# Altium PCB Rainbow F103C_Pcb.PcbDoc
Units mil, origin at the board's own origin, x right, y up, seen from the top; angles counter-clockwise.
Board outline 1950 x 850 mil, 2 copper layers (Top Layer, Bottom Layer); 62 components, 47 nets, 142 pads, 26 vias.
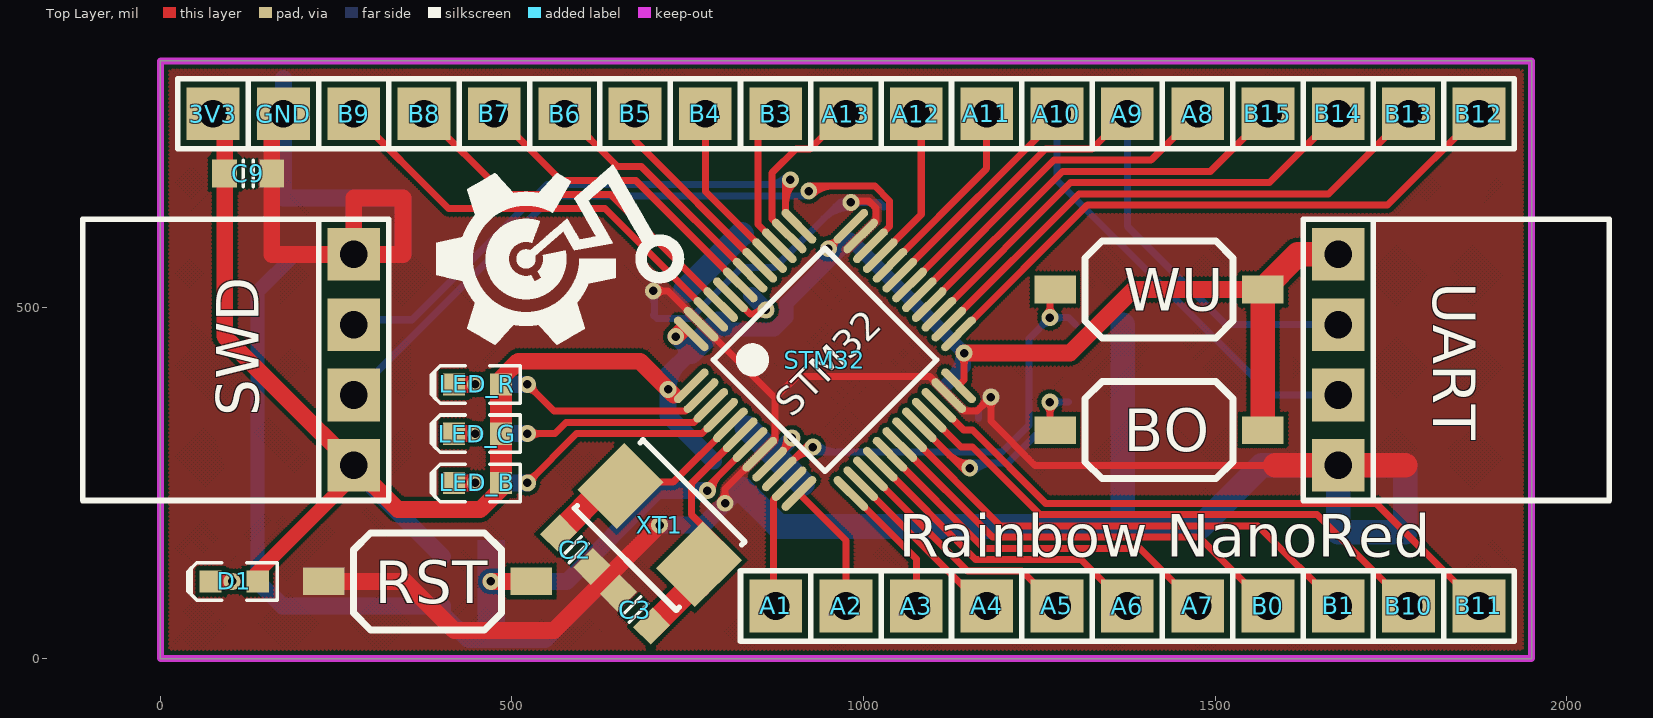
[diagram p0: Top Layer view]
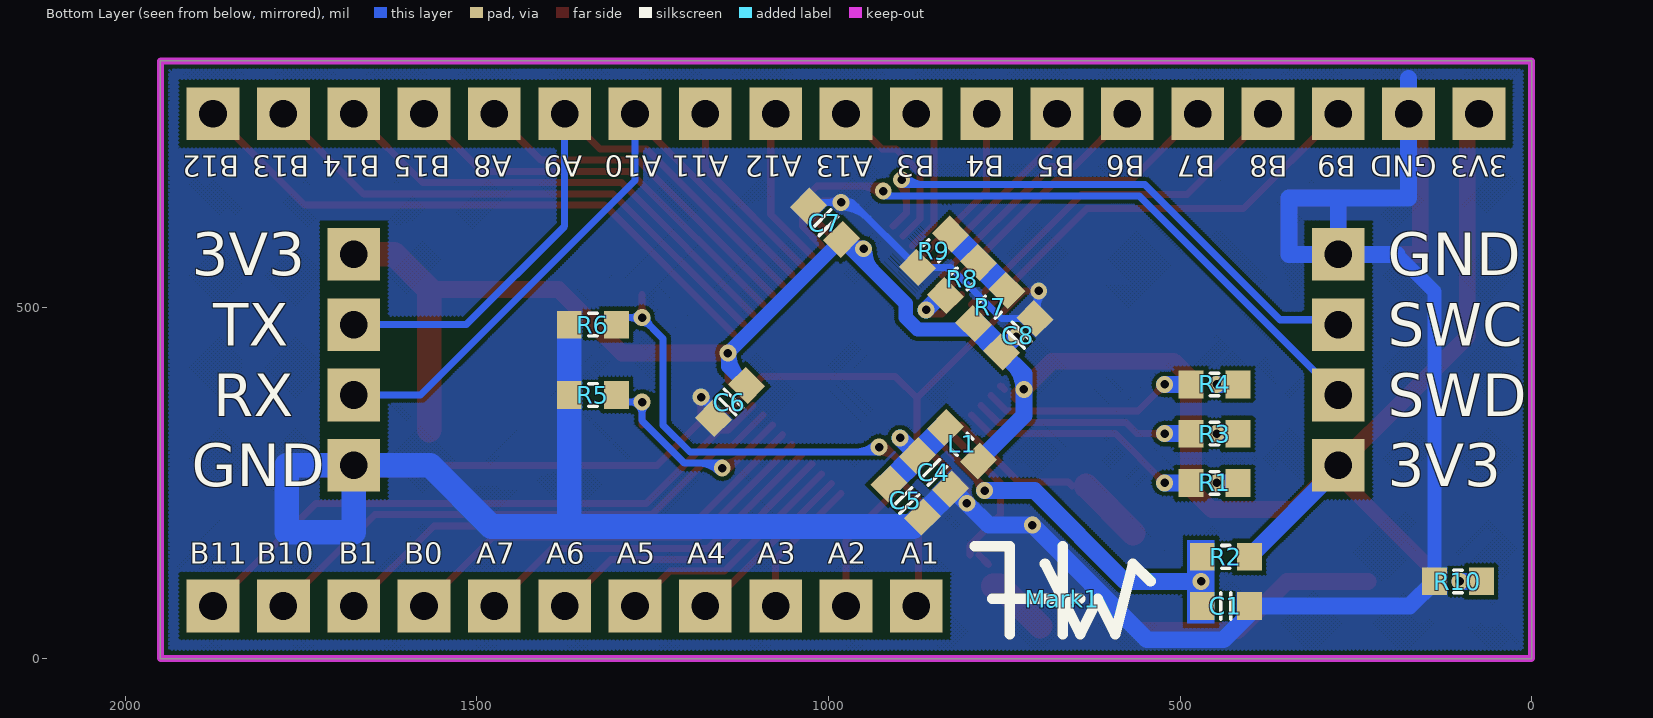
[diagram p1: Bottom Layer view, seen from below]

## Layer stack, top to bottom
Top Layer: signal copper 1.4
Dielectric: dielectric 12.6, FR-4, Dk 4.8
Bottom Layer: signal copper 1.4

## Board outline
0,850 1950,850 1950,0 0,0

## Design rules (kind name [scope] priority, off if disabled: settings)
Clearance [All] p1: gap=6
ComponentClearance [All] p1: gap=0 collisioncheckmode=3 verticalgap=0 showdistances=FALSE
MinimumSolderMaskSliver [All] p1: minsoldermaskwidth=5
PlaneConnect [All] p1: planeconnectstyle=Direct reliefexpansion=20 reliefentries=4 reliefconductorwidth=10 reliefairgap=10
PolygonConnect [All] p1: connectstyle=Direct reliefconductorwidth=10 reliefentries=4 polygonreliefangle="90 Angle" airgapwidth=10
RoutingVias [All] p1: holewidth=12 width=24 viastyle="Through Hole" minholewidth=12 minwidth=24 maxholewidth=50 maxwidth=100
SilkToSilkClearance [All] p1: silktosilkclearance=1
SilkToSolderMaskClearance [IsPad] p1: minsilkscreentomaskgap=1 clearancetoexposedcopper=TRUE
SolderMaskExpansion [All] p1: expansion=0
Width [All] p1: maxlimit=50 minlimit=6 preferedwidth=10
23 further rules are at their usual default settings.

## Components (designator, comment, footprint, x,y, rotation, side; value= is the part's Value field where it differs from the comment)
3V3 "HDR1X1_180_2.54" HDR1X1_180_2.54 75,775 r90 top (schematic designator VCC)
A1 "HDR1X1_180_2.54" HDR1X1_180_2.54 875,75 r0 top (schematic designator PA1)
A2 "HDR1X1_180_2.54" HDR1X1_180_2.54 975,75 r0 top (schematic designator PA2)
A3 "HDR1X1_180_2.54" HDR1X1_180_2.54 1075,75 r0 top (schematic designator PA3)
A4 "HDR1X1_180_2.54" HDR1X1_180_2.54 1175,75 r0 top (schematic designator PA4)
A5 "HDR1X1_180_2.54" HDR1X1_180_2.54 1275,75 r0 top (schematic designator PA5)
A6 "HDR1X1_180_2.54" HDR1X1_180_2.54 1375,75 r0 top (schematic designator PA6)
A7 "HDR1X1_180_2.54" HDR1X1_180_2.54 1475,75 r0 top (schematic designator PA7)
A8 "HDR1X1_180_2.54" HDR1X1_180_2.54 1475,775 r0 top (schematic designator PA8)
A9 "HDR1X1_180_2.54" HDR1X1_180_2.54 1375,775 r0 top (schematic designator PA9)
A10 "HDR1X1_180_2.54" HDR1X1_180_2.54 1275,775 r90 top (schematic designator PA10)
A11 "HDR1X1_180_2.54" HDR1X1_180_2.54 1175,775 r90 top (schematic designator PA11)
A12 "HDR1X1_180_2.54" HDR1X1_180_2.54 1075,775 r90 top (schematic designator PA12)
A13 "HDR1X1_180_2.54" HDR1X1_180_2.54 975,775 r90 top (schematic designator PA13)
B0 "HDR1X1_180_2.54" HDR1X1_180_2.54 1575,75 r0 top (schematic designator PB1)
B1 "HDR1X1_180_2.54" HDR1X1_180_2.54 1675,75 r0 top (schematic designator PB2)
B3 "HDR1X1_180_2.54" HDR1X1_180_2.54 875,775 r0 top (schematic designator PB3)
B4 "HDR1X1_180_2.54" HDR1X1_180_2.54 775,775 r0 top (schematic designator PB4)
B5 "HDR1X1_180_2.54" HDR1X1_180_2.54 675,775 r0 top (schematic designator PB5)
B6 "HDR1X1_180_2.54" HDR1X1_180_2.54 575,775 r0 top (schematic designator PB6)
B7 "HDR1X1_180_2.54" HDR1X1_180_2.54 475,775 r0 top (schematic designator PB7)
B8 "HDR1X1_180_2.54" HDR1X1_180_2.54 375,775 r0 top (schematic designator PB8)
B9 "HDR1X1_180_2.54" HDR1X1_180_2.54 275,775 r0 top (schematic designator PB9)
B10 "HDR1X1_180_2.54" HDR1X1_180_2.54 1775,75 r90 top (schematic designator PB10)
B11 "HDR1X1_180_2.54" HDR1X1_180_2.54 1875,75 r90 top (schematic designator PB11)
B12 "HDR1X1_180_2.54" HDR1X1_180_2.54 1875,775 r90 top (schematic designator PB12)
B13 "HDR1X1_180_2.54" HDR1X1_180_2.54 1775,775 r90 top (schematic designator PB13)
B14 "HDR1X1_180_2.54" HDR1X1_180_2.54 1675,775 r90 top (schematic designator PB14)
B15 "HDR1X1_180_2.54" HDR1X1_180_2.54 1575,775 r90 top (schematic designator PB15)
BO "BOOT" BT_TACT 1420,325 r270 top (schematic designator S3)
C1 "Cap_0603" CAP_0603 435,75 r180 bottom
C2 "Cap_0603" CAP_0603 590,155 r135 top
C3 "Cap_0603" CAP_0603 675,70 r315 top
C4 "Cap_0603" CAP_0603 850,265 r225 bottom
C5 "Cap_0603" CAP_0603 890,225 r225 bottom
C6 "Cap_0603" CAP_0603 1140,365 r135 bottom
C7 "Cap_0603" CAP_0603 1005,620 r225 bottom
C8 "Cap_0603" CAP_0603 730,460 r315 bottom
C9 "Cap_0603" CAP_0603 125,690 r180 top
D1 "LED_0603_BLUE" LED_0603_BLUE 105,110 r180 top
GND "HDR1X1_180_2.54" HDR1X1_180_2.54 175,775 r0 top
L1 "Ind_0603" IND_0603 810,305 r45 bottom
LED_B "LED_0603_BLUE" LED_0603_BLUE 451,250 r180 top
LED_G "LED_0603_GREEN" LED_0603_GREEN 451,320 r180 top
LED_R "LED_0603_RED" LED_0603_RED 451,390 r180 top
Mark1 "Mark" HW_Mark 667,85 r180 bottom
R1 "Res_0603" RES_0603 451,250 r180 bottom
R2 "Res_0603" RES_0603 435,145 r0 bottom
R3 "Res_0603" RES_0603 451,320 r180 bottom
R4 "Res_0603" RES_0603 451,390 r180 bottom
R5 "Res_0603" RES_0603 1335,375 r0 bottom
R6 "Res_0603" RES_0603 1335,475 r0 bottom
R7 "Res_0603" RES_0603 770,500 r315 bottom
R8 "Res_0603" RES_0603 810,540 r135 bottom
R9 "Res_0603" RES_0603 850,580 r315 bottom
R10 "Res_0603" RES_0603 105,110 r180 bottom
RST "RST" BT_TACT 380,110 r270 top locked (schematic designator S1)
STM32 "STM32F103C" STM32F_48 945,425 r45 top
SWD "HDR1X4_90F_2.54" HDR1X4_90F_2.54 275,275 r90 top
UART "HDR1X4_90F_2.54" HDR1X4_90F_2.54 1675,575 r270 top
WU "WU" BT_TACT 1420,525 r270 top (schematic designator S2)
XT1 "XTAL_5032" XTAL_5032 710,190 r135 top

## Footprints (in the part's own frame and the unit in brackets; to place one, negate y for a bottom-side part, rotate by r counter-clockwise, add the part's x,y. Pads: shape width x height; smd on the part's side, far side on the other; paste and mask are expansions set on the pad)
BT_TACT [mm]
  rect 1x1.5 smd: 1(0,-3.75) 2(0,3.75)
  silkscreen extent -1.75,-2.67 1.75,2.67, body extent -1.75,-3.59 1.75,3.61, height 5
CAP_0603 [mm] "Chip Capacitor, Body 1.6x0.8mm, 0603, IPC Medium Density"
  rect 0.9x1 smd: 1(-0.85,0) 2(0.85,0)
  Top Layer pour cut-out: -0.4,0.6 0.4,0.6 0.4,-0.6 -0.4,-0.6
  silkscreen extent -0.18,-0.48 0.18,0.48, body extent -0.85,-0.45 0.85,0.45, height 0.89
HDR1X1_180_2.54 [mm] "Connector; Header; 2 Position"
  rect 1.905x1.905 hole 1: 1(0,0)
  silkscreen extent -1.27,-1.27 1.27,1.27, body extent -1.27,-1.27 1.27,1.27, height 7.58
HDR1X4_90F_2.54 [mm] "Connector; Header; 2 Position"
  rect 1.905x1.905 hole 1: 1(0,0) 2(2.54,0) 3(5.08,0) 4(7.62,0)
  silkscreen extent -1.27,-1.27 8.89,9.78, body extent -1.39,-0.16 9.02,9.9, height 2.52
HW_Mark [mil]
  silkscreen extent -125,-50 125,75
IND_0603 [mm] "Chip bead, Body 1.6x0.8mm, 0603, IPC Medium Density"
  rect 0.9x1 smd: 1(-0.85,0) 2(0.85,0)
  Top Layer pour cut-out: -0.4,0.6 0.4,0.6 0.4,-0.6 -0.4,-0.6
  silkscreen extent -0.15,-0.41 0.15,0.41, body extent -0.8,-0.4 0.8,0.4, height 0.79
LED_0603_BLUE [mm] "Chip Capacitor, 2-Leads, Body 1.6x0.8mm, IPC Medium Density"
  rect 0.8x0.8 smd: 1(-0.85,0) 2(0.85,0)
  Top Layer pour cut-out: -0.5,0.5 0.5,0.5 0.5,-0.5 -0.5,-0.5
  silkscreen extent -1.55,-0.67 1.68,0.67, body extent -0.8,-0.4 0.8,0.4, height 0.75
LED_0603_GREEN [mm] "Chip Capacitor, 2-Leads, Body 1.6x0.8mm, IPC Medium Density"
  rect 0.8x0.8 smd: 1(-0.85,0) 2(0.85,0)
  Top Layer pour cut-out: -0.5,0.5 0.5,0.5 0.5,-0.5 -0.5,-0.5
  silkscreen extent -1.55,-0.67 1.68,0.67, body extent -0.8,-0.4 0.8,0.4, height 0.75
LED_0603_RED [mm] "Chip Capacitor, 2-Leads, Body 1.6x0.8mm, IPC Medium Density"
  rect 0.8x0.8 smd: 1(-0.85,0) 2(0.85,0)
  Top Layer pour cut-out: -0.5,0.5 0.5,0.5 0.5,-0.5 -0.5,-0.5
  silkscreen extent -1.55,-0.67 1.68,0.67, body extent -0.8,-0.4 0.8,0.4, height 0.75
RES_0603 [mm]
  rect 0.9x1 smd: 1(-0.85,0) 2(0.85,0)
  Top Layer pour cut-out: -0.4,0.6 0.4,0.6 0.4,-0.6 -0.4,-0.6
  silkscreen extent -0.15,-0.41 0.15,0.41, body extent -0.87,-0.47 0.88,0.48, height 0.54
STM32F_48 [mm] "TSQFP, 48-Leads, Body 9.0x9.0mm (max), Pitch 0.50mm, IPC Medium Density"
  oval 1.65x0.3 smd: 1(-4.075,2.75) 2(-4.075,2.25) 3(-4.075,1.75) 4(-4.075,1.25) 5(-4.075,0.75) 6(-4.075,0.25) 7(-4.075,-0.25) 8(-4.075,-0.75) 9(-4.075,-1.25) 10(-4.075,-1.75) 11(-4.075,-2.25) 12(-4.075,-2.75) 25(4.075,-2.75) 26(4.075,-2.25) 27(4.075,-1.75) 28(4.075,-1.25) 29(4.075,-0.75) 30(4.075,-0.25) 31(4.075,0.25) 32(4.075,0.75) 33(4.075,1.25) 34(4.075,1.75) 35(4.075,2.25) 36(4.075,2.75)
  oval 0.3x1.65 smd: 13(-2.75,-4.075) 14(-2.25,-4.075) 15(-1.75,-4.075) 16(-1.25,-4.075) 17(-0.75,-4.075) 18(-0.25,-4.075) 19(0.25,-4.075) 20(0.75,-4.075) 21(1.25,-4.075) 22(1.75,-4.075) 23(2.25,-4.075) 24(2.75,-4.075) 37(2.75,4.075) 38(2.25,4.075) 39(1.75,4.075) 40(1.25,4.075) 41(0.75,4.075) 42(0.25,4.075) 43(-0.25,4.075) 44(-0.75,4.075) 45(-1.25,4.075) 46(-1.75,4.075) 47(-2.25,4.075) 48(-2.75,4.075)
  silkscreen extent -2.85,-2.85 2.85,2.85, body extent -4.5,-4.5 4.5,4.5, height 1.59
XTAL_5032 [mm] "Molded Capacitor, 2-Leads, Body 5.0x3.2mm, IPC Medium Density"
  rect 2x2.4 smd: 1(-2,0) 2(2,0)
  silkscreen extent -2.6,-1.75 2.6,1.75, body extent -2.5,-1.6 2.5,1.6, height 1

## Part data
3V3 A1 A2 A3 A4 A5 A6 A7 A8 A9 A10 A11 A12 A13 B0 B1 B3 B4 B5 B6 B7 B8 B9 B10 B11 B12 B13 B14 B15 GND SWD UART: "Header"
BO RST WU: library part BT_TACT, "Switch"
C1 C2 C3 C4 C5 C6 C7 C8 C9: "Capacitor"
D1 LED_B LED_G LED_R: "LED"
L1: "Inductor"
Mark1: library part HW
R1 R2 R3 R4 R5 R6 R7 R8 R9 R10: "Resistor"
STM32: "MCU"
XT1: "Crystal Oscillator"

## Via types
v1: diameter 24, hole 12, Top Layer to Bottom Layer, 26 vias

## Nets (pads, with @x,y where several pads share a name; then routed paths per layer and width w, separated by ;. In a path a pad name is that pad's centre, name@x,y a point inside that pad or via, vN(x,y) a via of type N, cw(c..) or ccw(c..) an arc to the next point about the centre after c; other vN are vias at no path point)
3V3: 3V3.1 BO.2 C6.2 C7.2 C8.2 C9.2 D1.1 L1.1 LED_B.1 LED_G.1 LED_R.1 R2.1 R7.2 STM32.1 STM32.24 STM32.36 STM32.48 SWD.1 UART.1 WU.2 | length 3594.4
  Top Layer w10: SWD.1@275,260 SWD.1 ; STM32.1@749.89,383 STM32.1 ; v1@950,583.11 STM32.36 ; v1@950,590 ccw(c950,606.62) STM32.36@961.76,594.87 ; v1@957,583 cw(c974.17,583) STM32.36@962.03,595.14 ; STM32.24 1143,396.11 v1(1143,434.67) ; v1@1138.05,429.72 cw(c1126.1,417.77) 1143,417.77 cw(c1159.9,417.77) v1@1147.95,429.72
  Top Layer w20: D1.1@133,118 SWD.1@275,260
  Top Layer w24: 3V3.1 91.54,758.46 C9.2 91.54,458.46 219.5,330.5 219.5,330.04 230.04,319.5 230.5,319.5 SWD.1 338,212 455,212 484.46,241.46 LED_B.1 ; LED_R.1 484.46,398.46 509,423 682,423 v1@730,375 ; v1(733,458) v1@740.5,465.5 ; v1(1143,434.67) 1293.67,434.67 1384,525 WU.2
  Top Layer w31: LED_B.1 LED_G.1 LED_R.1
  Top Layer w35: BO.2 WU.2 1617.64,575 UART.1
  Bottom Layer w20: R7.2 802,468 873,468 890,485 890,505 C7.2 ; 933.86,548.86 ccw(c899.72,583) v1@948,583 ; v1@950.17,584.99 ccw(c953.59,624.08) C7.2 ; C6.2 1143,415.33 v1(1143,434.67) C7.2 ; C6.2@1125.9,398.23 ccw(c1089.46,434.67) v1@1141,434.67
  Bottom Layer w24: SWD.1 275,271.54 R2.1 ; v1(733,458) C8.2@754.16,436.84 ; 737.33,420 ccw(c774.33,383) v1(722,383) ; C8.2 722,404.67 v1(722,383) ; L1.1 722,345.67 v1(722,383)
  Bottom Layer w35: C8.2 754.16,436.84 R7.2
  other v1: 950,583
BOOT: BO.1 R5.1 STM32.20 | length 476.3
  Top Layer w10: STM32.20 v1@1145.38,266.38 ; 1121.57,290.19 ccw(c1151,319.63) v1@1151,278 ; 1138.64,273.12 ccw(c1151,285.48) v1@1151,268 ; v1@1260.05,360.05 cw(c1248.1,348.1) 1265,348.1 cw(c1281.9,348.1) v1@1269.95,360.05 ; BO.1@1265,332.36 v1(1265,365)
  Bottom Layer w10: v1@1151,278 1204.54,278 1265,338.46 v1(1265,365) R5.1@1291.54,365 ; v1@1155.95,266.05 cw(c1184.8,237.2) 1184.8,278 ; v1@1260.05,360.05 cw(c1248.1,348.1) 1265,348.1 cw(c1281.9,348.1) 1269.95,360.05 cw(c1281.9,348.1) 1281.9,365 cw(c1281.9,381.9) v1@1269.95,369.95
  other v1: 1151,271
BOOT0: R8.1 STM32.44 | length 120.1
  Top Layer w10: STM32.44 838.24,490 ; v1@854.97,499.56 cw(c838.24,509.42) 838.24,490 ; v1(861,496) 855,490 838.24,490
  Bottom Layer w10: R8.1 R8.1@840.66,516.34
  Bottom Layer w24: R8.1@840.66,516.34 v1(861,496)
GND: C1.2 C2.1 C3.1 C4.2 C5.2 C6.1 C7.1 C8.1 C9.1 GND.1 R5.2 R6.2 R9.2 R10.1 RST.1 STM32.8 STM32.23 STM32.35 STM32.47 SWD.4 UART.4 | length 6983.2
  Top Layer w10: v1(701,523) 721.73,523 STM32.47 874.21,370.51 ; v1@705.95,518.05 cw(c717.9,506.1) 717.9,523 cw(c717.9,539.9) v1@705.95,527.95 ; v1@798.05,225.95 ccw(c786.1,237.9) 803,237.9 ccw(c819.9,237.9) v1@807.95,225.95 ; v1(803,221) 803,241.24 STM32.8 874.21,312.45 874.21,370.51 ; v1@987,651 1007.38,651 1017.58,640.79 1017.58,622.86 STM32.35 ; v1@1174,372 cw(c1157.1,372) 1169.05,360.05 cw(c1181,348.1) v1@1181,365 ; v1@1176.05,367.05 cw(c1164.1,355.1) 1181,355.1 cw(c1197.9,355.1) v1@1185.95,367.05 ; 1585.76,275 1244,275 1181,338 v1(1181,372) 1161.42,352.42 1142.86,352.42 STM32.23 1094.27,401 904.7,401 874.21,370.51 ; UART.4@1669,269 UART.4@1675,263
  Top Layer w24: GND.1 165.46,775 158.46,768 C9.1 158.46,575 SWD.4 ; RST.1 348,110 418,40 560,40 v1(710,190) ; SWD.4 275,655 345,655 345,575 SWD.4
  Top Layer w35: 1585.76,275 UART.4 1770,275
  Bottom Layer w10: v1@696.05,518.05 cw(c679.27,501.27) C8.1@703,501.27 ; C8.1@701,489 C8.1 753.66,483.66 826.34,556.34 R9.2 966.33,649 ; C8.1@703,489 v1@703,523 ; 703,510.93 cw(c713.07,510.93) v1@705.95,518.05 ; 943.29,625.97 cw(c982,587.26) v1@982,642 ; 960.36,643.04 cw(c982,621.4) v1@982,652 ; v1@976.79,644.33 ccw(c966.33,634.95) 966.33,649 ; v1@976.79,653.67 cw(c966.33,663.05) 966.33,649 ; v1@986.95,644.05 cw(c998.9,632.1) 998.9,649 cw(c998.9,665.9) v1@986.95,653.95 ; C7.1@1028.66,642.66 1022.33,649 966.33,649 ; C6.1 1163.66,354.66 v1(1181,372) ; v1@1174,372 cw(c1157.1,372) 1169.05,360.05 cw(c1181,348.1) v1@1181,365
  Bottom Layer w20: R10.1 138.46,521.86 191.61,575
  Bottom Layer w24: R10.1 173.46,75 C1.2 401.54,63.46 438,27 547,27 v1(710,190) 772,190 v1(803,221) 823.34,241.34 C4.2 ; 175,825 GND.1 175,655 275,655 ; 191.61,575 SWD.4 ; SWD.4 345,575 345,655 275,655 ; SWD.4 275,655
  Bottom Layer w35: C4.2 C5.2 879.67,188 1479.21,188 1566.21,275 UART.4 ; 1368.46,188 R6.2 ; UART.4 1770,275 1770,180 1675,180 UART.4
  other v1: 982,649
LED_B: R1.1 STM32.4 | length 378.8
  Top Layer w10: v1(522,250) 592,320 770.4,320 STM32.4 ; v1@522,257 ccw(c522,273.9) 533.95,261.95 ccw(c545.9,250) v1@529,250
  Bottom Layer w24: R1.1 v1(522,250)
LED_G: R3.1 STM32.3 | length 341.6
  Top Layer w10: v1(522,320) 561,320 577,336 758.56,336 STM32.3 ; v1@526.95,315.05 cw(c538.9,303.1) 538.9,320 cw(c538.9,336.9) v1@526.95,324.95
  Bottom Layer w24: R3.1 v1(522,320)
LED_R: R4.1 STM32.2 | length 335.9
  Top Layer w10: v1@522,383 cw(c522,366.1) 533.95,378.05 cw(c545.9,390) v1@529,390 ; v1(522,390) 560,352 746.73,352 STM32.2
  Bottom Layer w24: R4.1 v1(522,390)
NetD1_2: D1.2 R10.2 | length 60.9
  Top Layer w24: D1.2 v1(102,110)
  Bottom Layer w24: R10.2 v1(102,110)
NetLED_B_2: LED_B.2 R1.2 | length 60.9
  Top Layer w24: LED_B.2 v1(448,250)
  Bottom Layer w24: R1.2 v1(448,250)
NetLED_G_2: LED_G.2 R3.2 | length 60.9
  Top Layer w24: LED_G.2 v1(448,320)
  Bottom Layer w24: R3.2 v1(448,320)
NetLED_R_2: LED_R.2 R4.2 | length 60.9
  Top Layer w24: LED_R.2 v1(448,390)
  Bottom Layer w24: R4.2 v1(448,390)
NetR7_1: R7.1 R8.2 R9.1 | length 113.1
  Bottom Layer w35: R7.1 R8.2 R9.1
PA1: A1.1 STM32.11 | length 232.5
  Top Layer w10: A1.1@850,100 A1.1 ; A1.1@872,61 872,226.73 STM32.11
PA2: A2.1 STM32.12 | length 187.7
  Top Layer w10: STM32.12 975,168.11 A2.1
PA3: A3.1 STM32.13 | length 198.6
  Top Layer w10: STM32.13 1075,141.89 A3.1
PA4: A4.1 STM32.14 | length 251.2
  Top Layer w10: STM32.14 1169.73,75 A4.1
PA5: A5.1 STM32.15 | length 343.1
  Top Layer w10: STM32.15 1147.56,125 1225,125 A5.1
PA6: A6.1 STM32.16 | length 434.9
  Top Layer w10: STM32.16 1159.4,141 1309,141 A6.1
PA7: A7.1 STM32.17 | length 526.8
  Top Layer w10: STM32.17 1171.24,157 1393,157 A7.1
PA8: A8.1 STM32.29 | length 502.3
  Top Layer w10: STM32.29 1270.76,709 1409,709 A8.1
PA9: A9.1 STM32.30 UART.2 | length 928.5
  Top Layer w10: STM32.30 1258.92,725 1325,725 A9.1
  Bottom Layer w10: A9.1 1375,615 1515,475 UART.2
PA10: A10.1 STM32.31 UART.3 | length 941.7
  Top Layer w10: STM32.31 A10.1@1278.04,771.96
  Bottom Layer w10: A10.1 1275,680 1580,375 UART.3
PA11: A11.1 STM32.32 | length 272.6
  Top Layer w10: STM32.32 1175,696.76 A11.1
PA12: A12.1 STM32.33 | length 228.8
  Top Layer w10: STM32.33 1082,631.6 1082,768 A12.1
PA15: A13.1 STM32.38 | length 244.4
  Top Layer w10: STM32.38 870,625.27 870,691 904,725 924,725 966,767 966,775 A13.1
PB0: B0.1 STM32.18 | length 618.6
  Top Layer w10: STM32.18 1183.08,173 1477,173 B0.1
PB1: B1.1 STM32.19 | length 710.5
  Top Layer w10: STM32.19 1194.92,189 1561,189 B1.1
PB3: B3.1 STM32.39 | length 175.4
  Top Layer w10: B3.1@850,750 850,617.44 STM32.39
PB4: B4.1 STM32.40 | length 239.6
  Top Layer w10: B4.1 775,664.6 STM32.40
PB5: B5.1 STM32.41 | length 289.2
  Top Layer w10: B5.1 675,736.76 STM32.41
PB6: B6.1 STM32.42 | length 358.6
  Top Layer w10: B6.1 650,700 683.92,700 STM32.42
PB7: B7.1 STM32.43 | length 450.5
  Top Layer w10: B7.1 570,680 676.08,680 STM32.43
PB8: B8.1 STM32.45 | length 534.2
  Top Layer w10: B8.1 490,660 640.4,660 STM32.45
PB9: B9.1 STM32.46 | length 626
  Top Layer w10: B9.1 410,640 632.56,640 STM32.46
PB10: B10.1 STM32.21 | length 794.2
  Top Layer w10: STM32.21 1138.6,301 1155,301 1251,205 1645,205 B10.1
PB11: B11.1 STM32.22 | length 886
  Top Layer w10: STM32.22 1142.44,325 1155,325 1259,221 1729,221 B11.1
PB12: B12.1 STM32.25 | length 869.7
  Top Layer w10: STM32.25 1318.11,645 1745,645 B12.1
PB13: B13.1 STM32.26 | length 777.8
  Top Layer w10: STM32.26 1306.27,661 1661,661 B13.1
PB14: B14.1 STM32.27 | length 686
  Top Layer w10: STM32.27 1294.44,677 1577,677 B14.1
PB15: B15.1 STM32.28 | length 594.2
  Top Layer w10: STM32.28 1282.6,693 1493,693 B15.1
RST: C1.1 R2.2 RST.2 STM32.7 | length 530
  Top Layer w10: v1(778,239) 778,244.08 STM32.7 ; v1@785,239 cw(c814.17,239) 793.54,259.62
  Top Layer w24: v1(470,110) RST.2@525,110
  Bottom Layer w24: v1(470,110) 578,110 707,239 v1(778,239)
SW_C: STM32.37 SWD.3 | length 831.5
  Top Layer w10: 889,647.2 cw(c929.8,647.2) v1@900.95,676.05 ; v1@889,681 889,634.11 STM32.37
  Bottom Layer w10: SWD.3@282,482 358,482 550,674 v1@896,674 ; 862.2,674 ccw(c862.2,714.8) v1@891.05,685.95
  other v1: 896,681
SW_D: STM32.34 SWD.2 | length 995.1
  Top Layer w10: v1@922,672 1016,672 1037,651 1037,614.44 STM32.34 ; v1@926.95,660.05 cw(c955.8,631.2) 955.8,672
  Bottom Layer w10: SWD.2 558,658 v1@922,658
  other v1: 922,665
VDDA: C4.1 C5.1 L1.2 STM32.9 | length 214.9
  Top Layer w10: STM32.9 v1@898.6,309 ; STM32.9@882.09,292.5 ccw(c860.59,314) v1@891,314
  Bottom Layer w24: C4.1@873.16,289.16 v1(898,314)
  Bottom Layer w35: L1.2 C4.1 C4.1@873.16,289.16 ; C4.1@876.16,286.16 C5.1
WU: R6.1 STM32.10 WU.1 | length 765.6
  Top Layer w10: STM32.10 v1@923.44,306 ; STM32.10@899.72,282.29 cw(c928,254.01) v1@928,294 ; v1@1260.05,489.95 ccw(c1248.1,501.9) 1265,501.9 ccw(c1281.9,501.9) v1@1269.95,489.95 ; v1(1265,485) WU.1@1265,517.64
  Bottom Layer w10: v1@928,294 1197,294 1235,332 1235,455 v1(1265,485) 1291.54,485 R6.1 ; v1@932.95,305.95 ccw(c961.8,334.8) 961.8,294 ; v1@1258,485 cw(c1241.1,485) 1253.05,473.05 cw(c1265,461.1) v1@1265,478 ; v1@1269.95,480.05 cw(c1281.9,468.1) 1281.9,485 cw(c1281.9,501.9) v1@1269.95,489.95
  other v1: 928,301
X1: C2.2 STM32.5 XT1.2 | length 288
  Top Layer w10: XT1.2@653.35,245.68 658.67,251 729.24,251 STM32.5
  Top Layer w35: C2.2 XT1.2@633.35,245.68
X2: C3.2 STM32.6 XT1.1 | length 327.4
  Top Layer w10: XT1.1@772.68,134.32 XT1.1@786,147.64 ; XT1.1@799,147.64 799,161 755,205 755,248.92 STM32.6
  Top Layer w35: C3.2 755.68,103.35 XT1.1@765.68,103.35

## Polygon pours and split planes (outlines as drawn)
GND on Bottom Layer "Top Layer-No Net" (hatched 45Degree grid 4 track 4, remove dead copper, pour order 2): 0,850 1950,850 1950,0 0,0
GND on Top Layer "Top Layer-No Net" (hatched 45Degree grid 4 track 4, remove dead copper, pour order 4): 0,850 1950,850 1950,0 0,0

## Keep-outs
Keep-Out Layer:
  the board outline again, w10

## Other copper
Top Layer:
  pour cut-out: 1625,625 1725,625 1725,225 1625,225
  pour cut-out: 225,625 325,625 325,225 225,225
  pour cut-out: 25,825 25,725 1925,725 1925,825
  pour cut-out: 825,125 825,25 1925,25 1925,125
Bottom Layer:
  rectangle net RST: 450.75,50 490,168.62
  pour cut-out: 225,625 325,625 325,225 225,225
  pour cut-out: 1625,625 1725,625 1725,225 1625,225
  pour cut-out: 25,825 25,725 1925,725 1925,825
  pour cut-out: 825,125 825,25 1925,25 1925,125

## Silkscreen, mask and mechanical layers (free items; w line width, h text height)
Top Overlay:
  drawing of 2626 lines, arcs and shapes, not listed
  text "STM32" at 898,341 h40 r45
  text "Rainbow NanoRed" at 1050,145 h60
Bottom Overlay:
  text "GND" at 205,545 h60
  text "3V3" at 1905,545 h60
  text "SWC" at 205,445 h60
  text "TX" at 1875,445 h60
  text "SWD" at 205,345 h60
  text "RX" at 1875,345 h60
  text "3V3" at 205,245 h60
  text "GND" at 1905,245 h60
  text "3V3" at -177,-2100 h60

## Dimensions
1950,850 to 1950,0 on Mechanical 13
0,850 to 1950,850 on Mechanical 13